# Altium PCB PCB1.PcbDoc (part 2 of 3)
Units mm, origin at the board's own origin, x right, y up, seen from the top; angles counter-clockwise.
Board outline 68.5 x 51.7 mm, 2 copper layers (Top Layer, Bottom Layer); 40 components, 24 nets, 162 pads, 41 vias.
Unrouted connection lines stored in the file: 2.
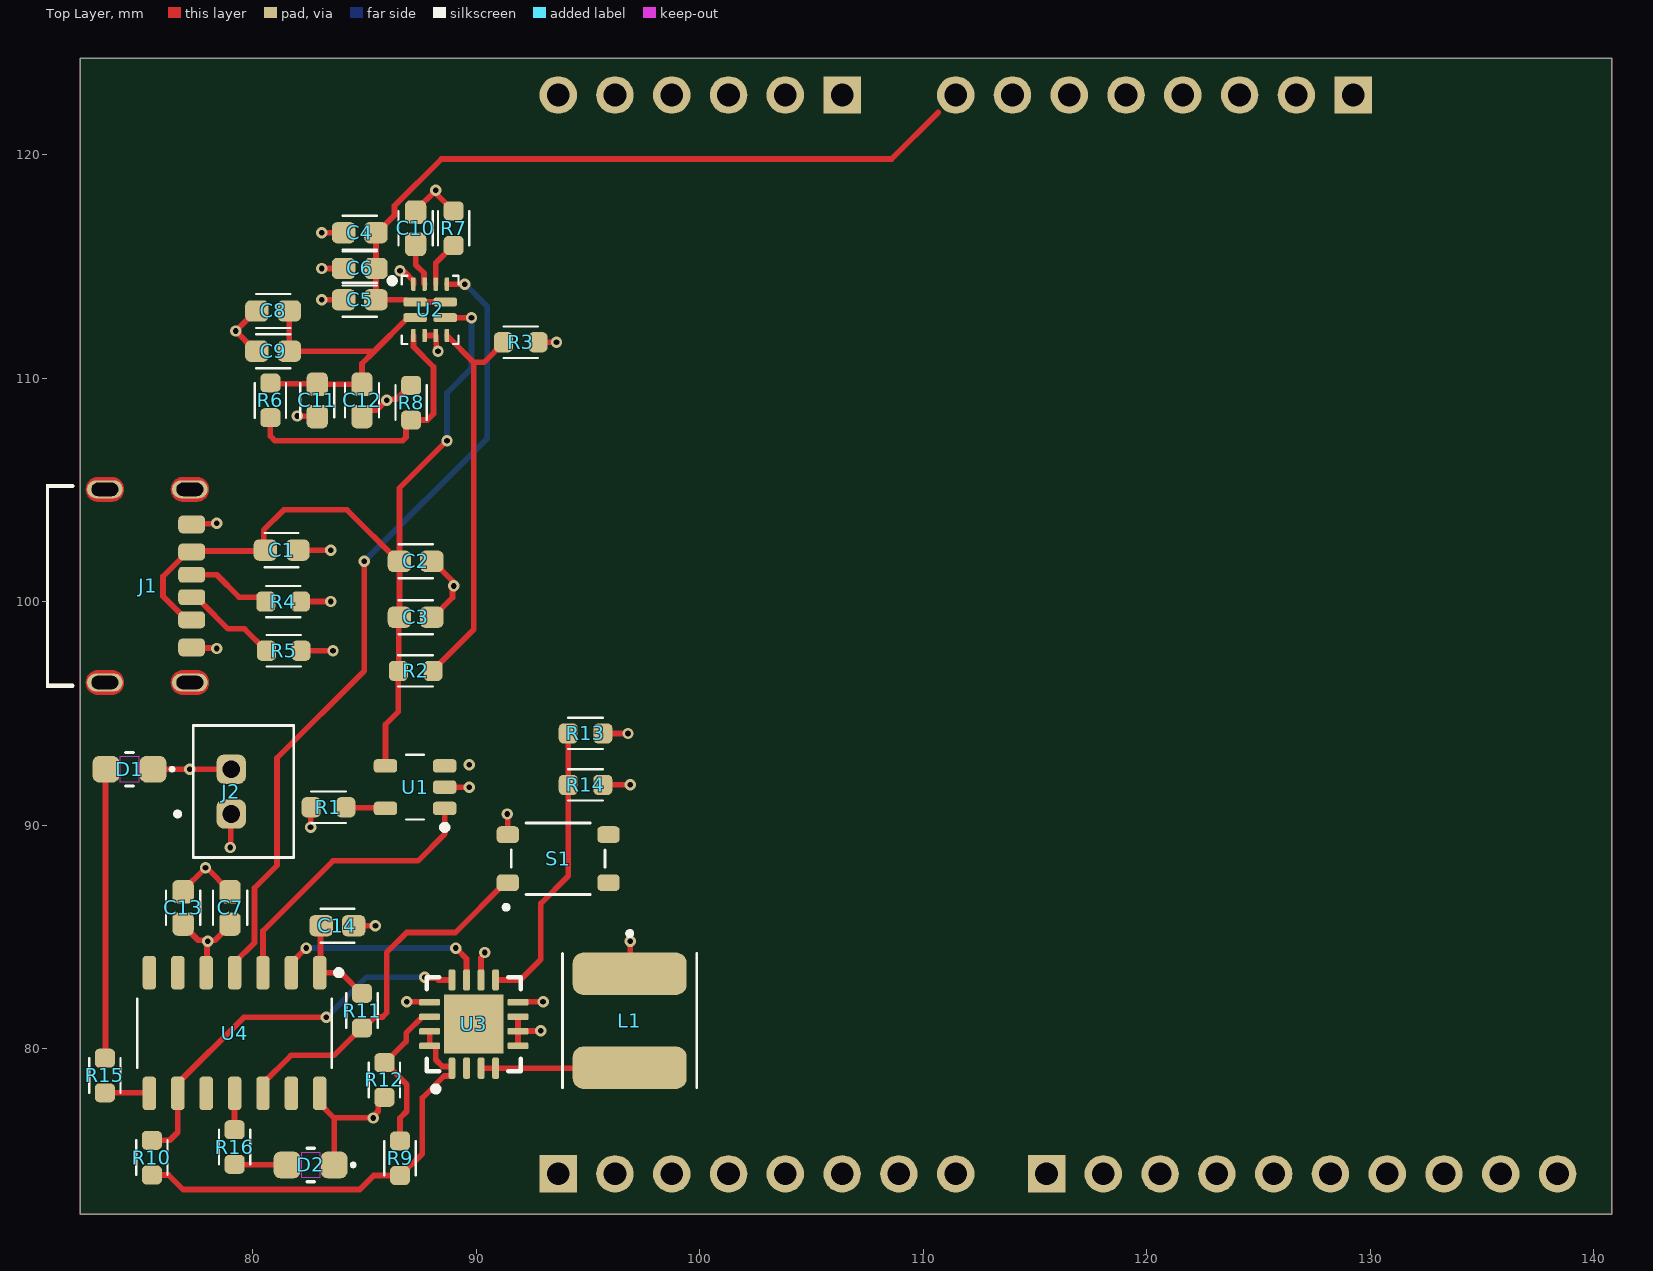
[diagram p0: Top Layer view]

## Part data (continued)
J1: "USB Connector, 6 Contact(s), Male, Right Angle, Surface Mount Terminal, Locking, Receptacle", Contact Resistance=50mΩ, Current Rating=4.25A, Dielectric Material="Liquid Crystal Polymer", Insulation Resistance=100MΩ, Manufacturer="Global Connector Technology", Max Operating Temperature=85°C, Min Operating Temperature=-30°C, Package=None, Supplier Part Number=2073-USB4125-GF-ACT-ND, Availability=Unavailable, Category="USB Connectors", China RoHS=Compliant, ComponentLink1Description=https://datasheet.octopart.com:443/USB4125-GF-A-Global-Connector-Technology-datasheet-166929326.pdf?src-supplier=SOS+electronic, ComponentLink1URL=https://datasheet.octopart.com:443/USB4125-GF-A-Global-Connector-Technology-datasheet-166929326.pdf?src-supplier=SOS+electronic, ComponentLink2Description=https://datasheet.octopart.com:443/USB4125-GF-A-GCT-datasheet-188869080.pdf?src-supplier=TME, ComponentLink2URL=https://datasheet.octopart.com:443/USB4125-GF-A-GCT-datasheet-188869080.pdf?src-supplier=TME, ComponentLink3Description=https://datasheet.octopart.com:443/USB4125-GF-A-GCT-datasheet-188869081.pdf?src-supplier=TME, ComponentLink3URL=https://datasheet.octopart.com:443/USB4125-GF-A-GCT-datasheet-188869081.pdf?src-supplier=TME, ComponentLink4Description=https://datasheet.octopart.com:443/USB4125-GF-A-GCT-datasheet-166929327.pdf?src-supplier=TME, ComponentLink4URL=https://datasheet.octopart.com:443/USB4125-GF-A-GCT-datasheet-166929327.pdf?src-supplier=TME, ComponentLink5Description=https://datasheet.octopart.com:443/USB4125-GF-A-Global-Connector-Technology-datasheet-148864632.pdf?src-supplier=Future+Electronics, ComponentLink5URL=https://datasheet.octopart.com:443/USB4125-GF-A-Global-Connector-Technology-datasheet-148864632.pdf?src-supplier=Future+Electronics, Contact Gender=Male, Gender=Receptacle, Lifecycle Status=Production, Manufacturer Part Number=USB4125-GF-A, MP=USB4125-GF-A_REVA2, Number of Ports=1, Number of Rows=1, Orientation=Horizontal, Pins=6, Price=None, Pricing="1=0,59, 10=0,505, 25=0,4736, 50=0,451, 100=0,4293, 250=0,4024, 500=0,38318 (USD)", REACH SVHC=Yes, RoHS=Compliant, Shell Finish=Nickel, Shell Material="Stainless Steel", Stock=22186, Supplier=DigiKey, Supplier 1=DigiKey, Supplier Part Number 1=2073-USB4125-GF-ACT-ND, Terminal Pitch=1mm
J2: "Connector Header, PH Series, 2 Position, 2.00mm, Through Hole, Press-Fit, Solder, Natural", Contact Resistance=20mΩ, Current Rating=2A, Housing Color=Natural, Insulation Resistance=1GΩ, Manufacturer=JST, Manufacturer Part Number=B2B-PH-K-S(LF)(SN), Max Operating Temperature=85°C, Max Voltage Rating (AC)=100V, Min Operating Temperature=-25°C, Package=None, Supplier Part Number=306-B2BPHKSLFSNPP, Category="Headers and Wire Housings", Check_prices=https://www.snapeda.com/parts/B2B-PH-K-S/JST/view-part/?ref=eda, China RoHS=Compliant, ComponentLink1Description=https://datasheet.octopart.com:443/B2B-PH-K-S%28LF%29%28SN%29-JST-datasheet-180491669.pdf?src-supplier=IHS, ComponentLink1URL=https://datasheet.octopart.com:443/B2B-PH-K-S%28LF%29%28SN%29-JST-datasheet-180491669.pdf?src-supplier=IHS, ComponentLink2Description=https://datasheet.octopart.com:443/B2B-PH-K-S%28LF%29%28SN%29-JST-datasheet-10411123.pdf?src-supplier=Upverter, ComponentLink2URL=https://datasheet.octopart.com:443/B2B-PH-K-S%28LF%29%28SN%29-JST-datasheet-10411123.pdf?src-supplier=Upverter, ComponentLink3Description=https://datasheet.octopart.com:443/B2B-PH-K-S%28LF%29%28SN%29-JST-datasheet-8324864.pdf?src-supplier=Upverter, ComponentLink3URL=https://datasheet.octopart.com:443/B2B-PH-K-S%28LF%29%28SN%29-JST-datasheet-8324864.pdf?src-supplier=Upverter, ComponentLink4Description=https://datasheet.octopart.com:443/B2B-PH-K-S%28LF%29%28SN%29-JST-datasheet-62336358.pdf?src-supplier=element14+APAC, ComponentLink4URL=https://datasheet.octopart.com:443/B2B-PH-K-S%28LF%29%28SN%29-JST-datasheet-62336358.pdf?src-supplier=element14+APAC, ComponentLink5Description=https://datasheet.octopart.com:443/B2B-PH-K-S%28LF%29%28SN%29-JST-datasheet-520811.pdf?src-supplier=element14+APAC, ComponentLink5URL=https://datasheet.octopart.com:443/B2B-PH-K-S%28LF%29%28SN%29-JST-datasheet-520811.pdf?src-supplier=element14+APAC, ComponentLink6Description=https://datasheet.octopart.com:443/B2B-PH-K-S%28LF%29%28SN%29-JST-datasheet-15068535.pdf?src-supplier=SOS+electronic, ComponentLink6URL=https://datasheet.octopart.com:443/B2B-PH-K-S%28LF%29%28SN%29-JST-datasheet-15068535.pdf?src-supplier=SOS+electronic, ComponentLink7Description=https://datasheet.octopart.com:443/B2B-PH-K-S%28LF%29%28SN%29-JST-datasheet-147762421.pdf?src-supplier=LKR, ComponentLink7URL=https://datasheet.octopart.com:443/B2B-PH-K-S%28LF%29%28SN%29-JST-datasheet-147762421.pdf?src-supplier=LKR, ComponentLink8Description=https://datasheet.octopart.com:443/B2B-PH-K-S%28LF%29%28SN%29-JST-datasheet-12510261.pdf?src-supplier=Future+Electronics, ComponentLink8URL=https://datasheet.octopart.com:443/B2B-PH-K-S%28LF%29%28SN%29-JST-datasheet-12510261.pdf?src-supplier=Future+Electronics, ComponentLink9Description=https://datasheet.octopart.com:443/B2B-PH-K-S%28LF%29%28SN%29-JST-datasheet-56537.pdf?src-supplier=Future+Electronics, ComponentLink9URL=https://datasheet.octopart.com:443/B2B-PH-K-S%28LF%29%28SN%29-JST-datasheet-56537.pdf?src-supplier=Future+Electronics, ComponentLink10Description=https://datasheet.octopart.com:443/B2B-PH-K-S%28LF%29%28SN%29-JST-datasheet-159515011.pdf?src-supplier=Amar+Radio+Corporation, ComponentLink10URL=https://datasheet.octopart.com:443/B2B-PH-K-S%28LF%29%28SN%29-JST-datasheet-159515011.pdf?src-supplier=Amar+Radio+Corporation, Connector Type="Male Pin", Contact Gender=Male, Contact Material=Brass, Contact Mating Length=3.302mm, Contact Plating=Tin, Depth=4.5mm, Fastening Type=Detent, Gender=Female, Height=6mm, Housing Material=Nylon, Lead Free="Lead Free", Lead Pitch=2mm, Length=5.9mm, Lifecycle Status=Production, Max Current Rating=2A, Max Voltage Rating (DC)=100V, MF="JST Sales America Inc.", Mounting Technology="Through Hole", MP=B2B-PH-K-S, Number of Contacts=2, Number of Poles=2, Number of Positions=2, Number of Rows=1, Orientation=Straight, Packaging=Bulk, Pins=2, Pitch=2mm, Pricing="1=0,1, 10=0,083, 50=0,083, 100=0,071, 1000=0,059, 10000=0,05 (USD)", REACH SVHC=Yes, RoHS=Compliant, Schedule B=8536694040, SnapEDA_Link=https://www.snapeda.com/parts/B2B-PH-K-S/JST/view-part/?ref=snap, Stock=3729, Supplier=Mouser, Supplier 1=Mouser, Supplier Part Number 1=306-B2BPHKSLFSNPP, Terminal Pitch=2mm, Termination=Solder, Voltage Rating=100V, Voltage Rating (AC)=100V, Voltage Rating (DC)=100V, Weight=28.349523g, Width=4.5mm, Working Voltage=100V
L1: library part "INDUCTOR - GENERIC", "Inductor Power Shielded Wirewound 6.8uH 20% 100KHz Ferrite 3.6A 0.0468Ohm DCR 2424 T/R", .Max DC Current='', .RMS Current (Irms)=3.6A, .Value=6.8µH, Case/Package=2424, Current Rating=4.7A, DC Resistance (DCR)=47mΩ, Inductance Tolerance=20%, Manufacturer=TDK, Manufacturer Lifecycle Status=PRODUCTION, Max Operating Temperature=105°C, Min Operating Temperature=-40°C, Supplier Part Number=445-173057-1-ND, Test Frequency=100kHz, Category="Fixed Inductors", ComponentLink1Description=https://datasheet.octopart.com:443/VLS6045EX-6R8M-TDK-datasheet-181269184.pdf?src-supplier=IHS, ComponentLink1URL=https://datasheet.octopart.com:443/VLS6045EX-6R8M-TDK-datasheet-181269184.pdf?src-supplier=IHS, ComponentLink2Description=https://datasheet.octopart.com:443/VLS6045EX-6R8M-TDK-datasheet-153842173.pdf?src-supplier=ODG+(Origin+Data+Global), ComponentLink2URL=https://datasheet.octopart.com:443/VLS6045EX-6R8M-TDK-datasheet-153842173.pdf?src-supplier=ODG+(Origin+Data+Global), ComponentLink3Description=https://datasheet.octopart.com:443/VLS6045EX-6R8M-TDK-datasheet-82987839.pdf?src-supplier=Newark, ComponentLink3URL=https://datasheet.octopart.com:443/VLS6045EX-6R8M-TDK-datasheet-82987839.pdf?src-supplier=Newark, ComponentLink4Description=https://datasheet.octopart.com:443/VLS6045EX-6R8M-TDK-datasheet-41475571.pdf?src-supplier=Newark, ComponentLink4URL=https://datasheet.octopart.com:443/VLS6045EX-6R8M-TDK-datasheet-41475571.pdf?src-supplier=Newark, ComponentLink5Description=https://datasheet.octopart.com:443/VLS6045EX-6R8M-TDK-datasheet-60278255.pdf?src-supplier=Future+Electronics, ComponentLink5URL=https://datasheet.octopart.com:443/VLS6045EX-6R8M-TDK-datasheet-60278255.pdf?src-supplier=Future+Electronics, Composition=Wirewound, Core Material=Ferrite, Height=4.5mm, Height - Seated (Max)=4.4958mm, Length=6mm, Lifecycle Status=Production, Manufacturer Part Number=VLS6045EX-6R8M, Max Current Rating=3.6A, Max Length=6.3mm, Max Width=6.3mm, Min Length=5.7mm, Min Width=5.7mm, Mounting Technology="Surface Mount", Number of Circuits=1, Number of Terminals=2, Pricing="1=0,34, 10=0,284, 100=0,2333 (USD)", REACH SVHC=Yes, RMS Current (Irms)=3.6A, RoHS=Compliant, Saturation Current=4.7A, Schedule B="8504500000, 8504500000|8504500000, 8504500000|8504500000|8504500000, 8504500000|8504500000|8504500000|8504500000", Shielding=Yes, Stock=199761, Supplier=DigiKey, Supplier 1=DigiKey, Supplier Part Number 1=445-173057-1-ND, Tolerance=20%, Width=6mm
R1: library part "RESISTOR - GENERIC", "Res Thick Film 0603 2K Ohm 1% 0.1W(1/10W) ±100ppm/C Epoxy Pad SMD Automotive T/R", .Case/Package=0603, .Tolerance=1%, Manufacturer="Yageo Group", Manufacturer Part Number=AC0603FR-102KL, Max Operating Temperature=155°C, Min Operating Temperature=-55°C, Power Dissipation=100mW, Supplier Part Number=13-AC0603FR-102KLCT-ND, Temperature Coefficient=100ppm/°C, Voltage Rating=75V, Case/Package=0603, Category="Chip SMD Resistors", China RoHS=Non-Compliant, ComponentLink1Description=https://datasheet.octopart.com:443/AC0603FR-102KL-Yageo-datasheet-182189377.pdf?src-supplier=IHS, ComponentLink1URL=https://datasheet.octopart.com:443/AC0603FR-102KL-Yageo-datasheet-182189377.pdf?src-supplier=IHS, ComponentLink2Description=https://datasheet.octopart.com:443/AC0603FR-102KL-Yageo-datasheet-151884373.pdf?src-supplier=Upverter, ComponentLink2URL=https://datasheet.octopart.com:443/AC0603FR-102KL-Yageo-datasheet-151884373.pdf?src-supplier=Upverter, ComponentLink3Description=https://sigma.octopart.com:443/138820526/technical_drawing/Yageo-AC0603FR-102KL.pdf?src-supplier=Upverter, ComponentLink3URL=https://sigma.octopart.com:443/138820526/technical_drawing/Yageo-AC0603FR-102KL.pdf?src-supplier=Upverter, ComponentLink4Description=https://datasheet.octopart.com:443/AC0603FR-102KL-Yageo-datasheet-86786639.pdf?src-supplier=Upverter, ComponentLink4URL=https://datasheet.octopart.com:443/AC0603FR-102KL-Yageo-datasheet-86786639.pdf?src-supplier=Upverter, ComponentLink5Description=https://datasheet.octopart.com:443/AC0603FR-102KL-Yageo-datasheet-178509465.pdf?src-supplier=Farnell, ComponentLink5URL=https://datasheet.octopart.com:443/AC0603FR-102KL-Yageo-datasheet-178509465.pdf?src-supplier=Farnell, ComponentLink6Description=https://datasheet.octopart.com:443/AC0603FR-102KL-Yageo-datasheet-166720450.pdf?src-supplier=JRH+Electronics, ComponentLink6URL=https://datasheet.octopart.com:443/AC0603FR-102KL-Yageo-datasheet-166720450.pdf?src-supplier=JRH+Electronics, ComponentLink7Description=https://datasheet.octopart.com:443/AC0603FR-102KL-Yageo-datasheet-137699919.pdf?src-supplier=Future+Electronics, ComponentLink7URL=https://datasheet.octopart.com:443/AC0603FR-102KL-Yageo-datasheet-137699919.pdf?src-supplier=Future+Electronics, ComponentLink8Description=https://datasheet.octopart.com/AC0603FR-102KL-Yageo-datasheet-12512238.pdf, ComponentLink8URL=https://datasheet.octopart.com/AC0603FR-102KL-Yageo-datasheet-12512238.pdf, ComponentLink9Description=http://sigma.octopart.com:80/rohs_statement/Yageo-company-2.pdf?src-supplier=Compliance+Statements, ComponentLink9URL=http://sigma.octopart.com:80/rohs_statement/Yageo-company-2.pdf?src-supplier=Compliance+Statements, ComponentLink10Description=http://sigma.octopart.com:80/conflict_mineral_statement/Yageo-company-3.pdf?src-supplier=Compliance+Statements, ComponentLink10URL=http://sigma.octopart.com:80/conflict_mineral_statement/Yageo-company-3.pdf?src-supplier=Compliance+Statements, Composition="Thick Film", Height=450µm, Lifecycle Status=Production, Mounting Technology="Surface Mount", Number of Terminals=2, Packaging="Tape & Reel", Power Rating=100mW, Pricing="1=0,1, 10=0,007, 25=0,006, 50=0,0052, 100=0,005 (USD)", REACH SVHC=Yes, RoHS=Compliant, Stock=20182, Supplier=DigiKey, Supplier 1=DigiKey, Supplier Part Number 1=13-AC0603FR-102KLCT-ND, Tolerance=1%, Width=800µm, Working Voltage=75V
R2: library part "RESISTOR - GENERIC", "Res Thick Film 0603 8.2K Ohm 1% 0.1W(1/10W) ±100ppm/C Pad SMD T/R", .Case/Package=0603, .Tolerance=1%, Case Code (Metric)=1608, Manufacturer="Yageo Group", Manufacturer Part Number=RC0603FR-138K2L, Max Operating Temperature=155°C, Min Operating Temperature=-55°C, Power Dissipation=100mW, Supplier Part Number=13-RC0603FR-138K2LCT-ND, Temperature Coefficient=100ppm/°C, Voltage Rating=50V, Working Voltage=75V, Case Code (Imperial)=0603, Case/Package=0603, Category="Chip SMD Resistors", China RoHS=Non-Compliant, ComponentLink1Description=https://datasheet.octopart.com:443/RC0603FR-138K2L-Yageo-datasheet-175887523.pdf?src-supplier=Newark, ComponentLink1URL=https://datasheet.octopart.com:443/RC0603FR-138K2L-Yageo-datasheet-175887523.pdf?src-supplier=Newark, ComponentLink2Description=https://datasheet.octopart.com:443/RC0603FR-138K2L-Yageo-datasheet-164759695.pdf?src-supplier=Future+Electronics, ComponentLink2URL=https://datasheet.octopart.com:443/RC0603FR-138K2L-Yageo-datasheet-164759695.pdf?src-supplier=Future+Electronics, ComponentLink3Description=https://datasheet.octopart.com/RC0603FR-138K2L-Yageo-datasheet-73766026.pdf, ComponentLink3URL=https://datasheet.octopart.com/RC0603FR-138K2L-Yageo-datasheet-73766026.pdf, ComponentLink4Description=http://sigma.octopart.com:80/rohs_statement/Yageo-company-2.pdf?src-supplier=Compliance+Statements, ComponentLink4URL=http://sigma.octopart.com:80/rohs_statement/Yageo-company-2.pdf?src-supplier=Compliance+Statements, ComponentLink5Description=http://sigma.octopart.com:80/conflict_mineral_statement/Yageo-company-3.pdf?src-supplier=Compliance+Statements, ComponentLink5URL=http://sigma.octopart.com:80/conflict_mineral_statement/Yageo-company-3.pdf?src-supplier=Compliance+Statements, Composition="Thick Film", Depth=800µm, Height=450µm, Length=1.6mm, Lifecycle Status=Production, Military Standard=Not, Mounting Technology="Surface Mount", Number of Terminals=2, Power Rating=100mW, Pricing="1=0,1, 10=0,008, 25=0,0072, 50=0,0062, 100=0,0051, 250=0,004 (USD)", REACH SVHC=Yes, RoHS=Compliant, Schedule B="8533210045, 8533210045|8533210045, 8533210045|8533210045|8533210045, 8533210045|8533210045|8533210045|8533210045", Stock=30843, Supplier=DigiKey, Supplier 1=DigiKey, Supplier Part Number 1=13-RC0603FR-138K2LCT-ND, Termination=SMD/SMT, Tolerance=1%, Width=800µm
R3 R4 R5 R8: library part "RESISTOR - GENERIC", "Res Thick Film 0603 5.1K Ohm 1% 0.1W(1/10W) ±100ppm/C Pad SMD T/R", .Case/Package=0603, .Tolerance=1%, Manufacturer="Yageo Group", Manufacturer Part Number=RC0603FR-075K1L, Max Operating Temperature=155°C, Max Power Dissipation=100mW, Min Operating Temperature=-55°C, Supplier Part Number=311-5.10KHRCT-ND, Temperature Coefficient=100ppm/°C, Voltage Rating=75V, Voltage Rating (DC)=50V, Case Code (Imperial)=0603, Case/Package=0603, Category="Chip SMD Resistors", China RoHS=Non-Compliant, ComponentLink1Description=https://datasheet.octopart.com:443/RC0603FR-075K1L-Yageo-datasheet-175887523.pdf?src-supplier=IHS, ComponentLink1URL=https://datasheet.octopart.com:443/RC0603FR-075K1L-Yageo-datasheet-175887523.pdf?src-supplier=IHS, ComponentLink2Description=https://datasheet.octopart.com:443/RC0603FR-075K1L-Yageo-datasheet-103092701.pdf?src-supplier=Upverter, ComponentLink2URL=https://datasheet.octopart.com:443/RC0603FR-075K1L-Yageo-datasheet-103092701.pdf?src-supplier=Upverter, ComponentLink3Description=https://datasheet.octopart.com:443/RC0603FR-075K1L-Yageo-datasheet-8328172.pdf?src-supplier=Farnell, ComponentLink3URL=https://datasheet.octopart.com:443/RC0603FR-075K1L-Yageo-datasheet-8328172.pdf?src-supplier=Farnell, ComponentLink4Description=https://datasheet.octopart.com:443/RC0603FR-075K1L-Yageo-datasheet-62067350.pdf?src-supplier=Farnell, ComponentLink4URL=https://datasheet.octopart.com:443/RC0603FR-075K1L-Yageo-datasheet-62067350.pdf?src-supplier=Farnell, ComponentLink5Description=https://datasheet.octopart.com:443/RC0603FR-075K1L-Yageo-datasheet-34211833.pdf?src-supplier=element14+APAC, ComponentLink5URL=https://datasheet.octopart.com:443/RC0603FR-075K1L-Yageo-datasheet-34211833.pdf?src-supplier=element14+APAC, ComponentLink6Description=https://datasheet.octopart.com:443/RC0603FR-075K1L-Yageo-datasheet-164759695.pdf?src-supplier=Future+Electronics, ComponentLink6URL=https://datasheet.octopart.com:443/RC0603FR-075K1L-Yageo-datasheet-164759695.pdf?src-supplier=Future+Electronics, ComponentLink7Description=https://datasheet.octopart.com:443/RC0603FR-075K1L-Yageo-datasheet-137700087.pdf?src-supplier=Future+Electronics, ComponentLink7URL=https://datasheet.octopart.com:443/RC0603FR-075K1L-Yageo-datasheet-137700087.pdf?src-supplier=Future+Electronics, ComponentLink8Description=https://datasheet.octopart.com:443/RC0603FR-075K1L-Yageo-datasheet-15599030.pdf?src-supplier=Future+Electronics, ComponentLink8URL=https://datasheet.octopart.com:443/RC0603FR-075K1L-Yageo-datasheet-15599030.pdf?src-supplier=Future+Electronics, ComponentLink9Description=https://datasheet.octopart.com:443/RC0603FR-075K1L-Yageo-datasheet-12596169.pdf?src-supplier=Future+Electronics, ComponentLink9URL=https://datasheet.octopart.com:443/RC0603FR-075K1L-Yageo-datasheet-12596169.pdf?src-supplier=Future+Electronics, ComponentLink10Description=https://datasheet.octopart.com:443/RC0603FR-075K1L-Yageo-datasheet-503470.pdf?src-supplier=Future+Electronics, ComponentLink10URL=https://datasheet.octopart.com:443/RC0603FR-075K1L-Yageo-datasheet-503470.pdf?src-supplier=Future+Electronics, ComponentLink11Description=https://datasheet.octopart.com:443/RC0603FR-075K1L-Yageo-datasheet-148775077.pdf?src-supplier=TME, ComponentLink11URL=https://datasheet.octopart.com:443/RC0603FR-075K1L-Yageo-datasheet-148775077.pdf?src-supplier=TME, ComponentLink12Description=https://datasheet.octopart.com:443/RC0603FR-075K1L-Yageo-datasheet-79472498.pdf?src-supplier=Megastar, ComponentLink12URL=https://datasheet.octopart.com:443/RC0603FR-075K1L-Yageo-datasheet-79472498.pdf?src-supplier=Megastar, ComponentLink13Description=https://datasheet.octopart.com/RC0603FR-075K1L-Yageo-datasheet-73766026.pdf, ComponentLink13URL=https://datasheet.octopart.com/RC0603FR-075K1L-Yageo-datasheet-73766026.pdf, ComponentLink14Description=https://datasheet.octopart.com:443/RC0603FR-075K1L-Yageo-datasheet-118562.pdf?src-supplier=DigiKey, ComponentLink14URL=https://datasheet.octopart.com:443/RC0603FR-075K1L-Yageo-datasheet-118562.pdf?src-supplier=DigiKey, ComponentLink15Description=http://sigma.octopart.com:80/conflict_mineral_statement/Yageo-company-3.pdf?src-supplier=Compliance+Statements, ComponentLink15URL=http://sigma.octopart.com:80/conflict_mineral_statement/Yageo-company-3.pdf?src-supplier=Compliance+Statements, ComponentLink16Description=http://sigma.octopart.com:80/rohs_statement/Yageo-company-2.pdf?src-supplier=Compliance+Statements, ComponentLink16URL=http://sigma.octopart.com:80/rohs_statement/Yageo-company-2.pdf?src-supplier=Compliance+Statements, Composition="Thick Film", Depth=800µm, Features="Moisture Resistant", Height=450µm, Lead Free="Lead Free", Lifecycle Status=Production, Military Standard=Not, Mounting Technology="Surface Mount", Number of Terminals=2, Number of Terminations=2, Packaging="Tape & Reel", Pins=2, Power Dissipation=100mW, Power Rating=100mW, Pricing="1=0,1, 10=0,007, 25=0,0068, 50=0,0062, 100=0,0056 (USD)", REACH SVHC=Yes, RoHS=Compliant, Schedule B="8533210045, 8533210045|8533210045, 8533210045|8533210045|8533210045, 8533210045|8533210045|8533210045|8533210045", Stock=734211, Supplier=DigiKey, Supplier 1=DigiKey, Supplier Part Number 1=311-5.10KHRCT-ND, Termination=SMD/SMT, Tolerance=1%, Width=800µm, Working Voltage=75V
R6 R11: library part "RESISTOR - GENERIC", "100mW Thick Film Resistors ±100ppm/℃ ±1% 10kΩ 0603 Chip Resistor - Surface Mount ROHS", .Case/Package=0603, .Tolerance=1%, Manufacturer="Yageo Group", Manufacturer Part Number=RC0603FR-0710KL, Max Operating Temperature=155°C, Min Operating Temperature=-55°C, Power Dissipation=100mW, Supplier Part Number=311-10.0KHRCT-ND, Temperature Coefficient=100ppm/°C, Voltage Rating=75V, Voltage Rating (DC)=50V, Case Code (Imperial)=0603, Case Code (Metric)=0603, Case/Package=0603, Category="Chip SMD Resistors", China RoHS=Non-Compliant, ComponentLink1Description=https://datasheet.octopart.com:443/RC0603FR-0710KL-Yageo-datasheet-175887523.pdf?src-supplier=IHS, ComponentLink1URL=https://datasheet.octopart.com:443/RC0603FR-0710KL-Yageo-datasheet-175887523.pdf?src-supplier=IHS, ComponentLink2Description=https://datasheet.octopart.com:443/RC0603FR-0710KL-Yageo-datasheet-103092701.pdf?src-supplier=Upverter, ComponentLink2URL=https://datasheet.octopart.com:443/RC0603FR-0710KL-Yageo-datasheet-103092701.pdf?src-supplier=Upverter, ComponentLink3Description=https://datasheet.octopart.com:443/RC0603FR-0710KL-Yageo-datasheet-98239111.pdf?src-supplier=Upverter, ComponentLink3URL=https://datasheet.octopart.com:443/RC0603FR-0710KL-Yageo-datasheet-98239111.pdf?src-supplier=Upverter, ComponentLink4Description=https://datasheet.octopart.com:443/RC0603FR-0710KL-Yageo-datasheet-141265859.pdf?src-supplier=Upverter, ComponentLink4URL=https://datasheet.octopart.com:443/RC0603FR-0710KL-Yageo-datasheet-141265859.pdf?src-supplier=Upverter, ComponentLink5Description=https://sigma.octopart.com:443/138820526/technical_drawing/Yageo-RC0603FR-0710KL.pdf?src-supplier=Upverter, ComponentLink5URL=https://sigma.octopart.com:443/138820526/technical_drawing/Yageo-RC0603FR-0710KL.pdf?src-supplier=Upverter, ComponentLink6Description=https://datasheet.octopart.com:443/RC0603FR-0710KL-Yageo-datasheet-8328172.pdf?src-supplier=Farnell, ComponentLink6URL=https://datasheet.octopart.com:443/RC0603FR-0710KL-Yageo-datasheet-8328172.pdf?src-supplier=Farnell, ComponentLink7Description=https://datasheet.octopart.com:443/RC0603FR-0710KL-Yageo-datasheet-13691069.pdf?src-supplier=Farnell, ComponentLink7URL=https://datasheet.octopart.com:443/RC0603FR-0710KL-Yageo-datasheet-13691069.pdf?src-supplier=Farnell, ComponentLink8Description=https://datasheet.octopart.com:443/RC0603FR-0710KL-Yageo-datasheet-62067350.pdf?src-supplier=element14+APAC, ComponentLink8URL=https://datasheet.octopart.com:443/RC0603FR-0710KL-Yageo-datasheet-62067350.pdf?src-supplier=element14+APAC, ComponentLink9Description=https://datasheet.octopart.com:443/RC0603FR-0710KL-Yageo-datasheet-17842380.pdf?src-supplier=element14+APAC, ComponentLink9URL=https://datasheet.octopart.com:443/RC0603FR-0710KL-Yageo-datasheet-17842380.pdf?src-supplier=element14+APAC, ComponentLink10Description=https://datasheet.octopart.com:443/RC0603FR-0710KL-Yageo-datasheet-15599030.pdf?src-supplier=Future+Electronics, ComponentLink10URL=https://datasheet.octopart.com:443/RC0603FR-0710KL-Yageo-datasheet-15599030.pdf?src-supplier=Future+Electronics, ComponentLink11Description=https://datasheet.octopart.com:443/RC0603FR-0710KL-Yageo-datasheet-164759695.pdf?src-supplier=Future+Electronics, ComponentLink11URL=https://datasheet.octopart.com:443/RC0603FR-0710KL-Yageo-datasheet-164759695.pdf?src-supplier=Future+Electronics, ComponentLink12Description=https://datasheet.octopart.com:443/RC0603FR-0710KL-Yageo-datasheet-127823281.pdf?src-supplier=Future+Electronics, ComponentLink12URL=https://datasheet.octopart.com:443/RC0603FR-0710KL-Yageo-datasheet-127823281.pdf?src-supplier=Future+Electronics, ComponentLink13Description=https://datasheet.octopart.com:443/RC0603FR-0710KL-Yageo-datasheet-137700087.pdf?src-supplier=Future+Electronics, ComponentLink13URL=https://datasheet.octopart.com:443/RC0603FR-0710KL-Yageo-datasheet-137700087.pdf?src-supplier=Future+Electronics, ComponentLink14Description=https://datasheet.octopart.com:443/RC0603FR-0710KL-Yageo-datasheet-27584510.pdf?src-supplier=Future+Electronics, ComponentLink14URL=https://datasheet.octopart.com:443/RC0603FR-0710KL-Yageo-datasheet-27584510.pdf?src-supplier=Future+Electronics, ComponentLink15Description=https://datasheet.octopart.com:443/RC0603FR-0710KL-Yageo-datasheet-8324193.pdf?src-supplier=Future+Electronics, ComponentLink15URL=https://datasheet.octopart.com:443/RC0603FR-0710KL-Yageo-datasheet-8324193.pdf?src-supplier=Future+Electronics, ComponentLink16Description=https://datasheet.octopart.com:443/RC0603FR-0710KL-Yageo-datasheet-12596169.pdf?src-supplier=Newark, ComponentLink16URL=https://datasheet.octopart.com:443/RC0603FR-0710KL-Yageo-datasheet-12596169.pdf?src-supplier=Newark, ComponentLink17Description=https://datasheet.octopart.com:443/RC0603FR-0710KL-Yageo-datasheet-503470.pdf?src-supplier=Newark, ComponentLink17URL=https://datasheet.octopart.com:443/RC0603FR-0710KL-Yageo-datasheet-503470.pdf?src-supplier=Newark, ComponentLink18Description=https://datasheet.octopart.com:443/RC0603FR-0710KL-Yageo-datasheet-34211833.pdf?src-supplier=Newark, ComponentLink18URL=https://datasheet.octopart.com:443/RC0603FR-0710KL-Yageo-datasheet-34211833.pdf?src-supplier=Newark, ComponentLink19Description=https://datasheet.octopart.com:443/RC0603FR-0710KL-Yageo-datasheet-79472498.pdf?src-supplier=Megastar, ComponentLink19URL=https://datasheet.octopart.com:443/RC0603FR-0710KL-Yageo-datasheet-79472498.pdf?src-supplier=Megastar, ComponentLink20Description=https://datasheet.octopart.com/RC0603FR-0710KL-Yageo-datasheet-73766026.pdf, ComponentLink20URL=https://datasheet.octopart.com/RC0603FR-0710KL-Yageo-datasheet-73766026.pdf, ComponentLink21Description=https://datasheet.octopart.com:443/RC0603FR-0710KL-Yageo-datasheet-118562.pdf?src-supplier=DigiKey, ComponentLink21URL=https://datasheet.octopart.com:443/RC0603FR-0710KL-Yageo-datasheet-118562.pdf?src-supplier=DigiKey, ComponentLink22Description=http://sigma.octopart.com:80/conflict_mineral_statement/Yageo-company-3.pdf?src-supplier=Compliance+Statements, ComponentLink22URL=http://sigma.octopart.com:80/conflict_mineral_statement/Yageo-company-3.pdf?src-supplier=Compliance+Statements, ComponentLink23Description=http://sigma.octopart.com:80/rohs_statement/Yageo-company-2.pdf?src-supplier=Compliance+Statements, ComponentLink23URL=http://sigma.octopart.com:80/rohs_statement/Yageo-company-2.pdf?src-supplier=Compliance+Statements, Composition="Thick Film", Depth=800µm, Height=450µm, Lead Free="Lead Free", Lead Pitch=300µm, Length=1.6mm, Lifecycle Status=Production, Military Standard=Not, Mounting Technology="Surface Mount", Number of Terminals=2, Packaging="Tape & Reel", Pins=2, Power Rating=100mW, Pricing="1=0,1, 10=0,006, 25=0,0052 (USD)", REACH SVHC=Yes, RoHS=Compliant, Schedule B="8533210045, 8533210045|8533210045|8533210045|8533210045|8533210045|8533210045|8533210045|8533210045|8533210045|8533210045|8533210045|8533210045|8533210045|8533210045|8533210045|8533210045|8533210045|8533210045|8533210045|8533210045|8533210045|8533210045|8533210045|85", Stock=13219476, Supplier=DigiKey, Supplier 1=DigiKey, Supplier Part Number 1=311-10.0KHRCT-ND, Termination=SMD/SMT, Tolerance=1%, Weight=2.012816mg, Width=800µm, Working Voltage=75V
R7: library part "RESISTOR - GENERIC", "Res Thick Film 0603 21.5K Ohm 1% 0.1W(1/10W) ±100ppm/C Pad SMD T/R", .Case/Package=0603, .Tolerance=1%, Manufacturer="Yageo Group", Manufacturer Part Number=RC0603FR-0721K5L, Max Operating Temperature=155°C, Max Power Dissipation=100mW, Min Operating Temperature=-55°C, Supplier Part Number=603-RC0603FR-0721K5L, Temperature Coefficient=100ppm/°C, Voltage Rating=75V, Voltage Rating (DC)=50V, Case Code (Imperial)=0603, Case/Package=0603, Category="Chip SMD Resistors", China RoHS=Non-Compliant, ComponentLink1Description=https://datasheet.octopart.com:443/RC0603FR-0721K5L-Yageo-datasheet-175887523.pdf?src-supplier=Newark, ComponentLink1URL=https://datasheet.octopart.com:443/RC0603FR-0721K5L-Yageo-datasheet-175887523.pdf?src-supplier=Newark, ComponentLink2Description=https://datasheet.octopart.com:443/RC0603FR-0721K5L-Yageo-datasheet-103092701.pdf?src-supplier=Upverter, ComponentLink2URL=https://datasheet.octopart.com:443/RC0603FR-0721K5L-Yageo-datasheet-103092701.pdf?src-supplier=Upverter, ComponentLink3Description=https://datasheet.octopart.com:443/RC0603FR-0721K5L-Yageo-Group-datasheet-189192902.pdf?src-supplier=TME, ComponentLink3URL=https://datasheet.octopart.com:443/RC0603FR-0721K5L-Yageo-Group-datasheet-189192902.pdf?src-supplier=TME, ComponentLink4Description=https://datasheet.octopart.com:443/RC0603FR-0721K5L-Yageo-Group-datasheet-176638170.pdf?src-supplier=TME, ComponentLink4URL=https://datasheet.octopart.com:443/RC0603FR-0721K5L-Yageo-Group-datasheet-176638170.pdf?src-supplier=TME, ComponentLink5Description=https://datasheet.octopart.com:443/RC0603FR-0721K5L-Yageo-datasheet-164759695.pdf?src-supplier=Future+Electronics, ComponentLink5URL=https://datasheet.octopart.com:443/RC0603FR-0721K5L-Yageo-datasheet-164759695.pdf?src-supplier=Future+Electronics, ComponentLink6Description=https://datasheet.octopart.com:443/RC0603FR-0721K5L-Yageo-datasheet-137700087.pdf?src-supplier=Future+Electronics, ComponentLink6URL=https://datasheet.octopart.com:443/RC0603FR-0721K5L-Yageo-datasheet-137700087.pdf?src-supplier=Future+Electronics, ComponentLink7Description=https://datasheet.octopart.com:443/RC0603FR-0721K5L-Yageo-datasheet-15599030.pdf?src-supplier=Future+Electronics, ComponentLink7URL=https://datasheet.octopart.com:443/RC0603FR-0721K5L-Yageo-datasheet-15599030.pdf?src-supplier=Future+Electronics, ComponentLink8Description=https://datasheet.octopart.com:443/RC0603FR-0721K5L-Yageo-datasheet-12596169.pdf?src-supplier=Future+Electronics, ComponentLink8URL=https://datasheet.octopart.com:443/RC0603FR-0721K5L-Yageo-datasheet-12596169.pdf?src-supplier=Future+Electronics, ComponentLink9Description=https://datasheet.octopart.com:443/RC0603FR-0721K5L-Yageo-datasheet-8328172.pdf?src-supplier=Future+Electronics, ComponentLink9URL=https://datasheet.octopart.com:443/RC0603FR-0721K5L-Yageo-datasheet-8328172.pdf?src-supplier=Future+Electronics, ComponentLink10Description=https://datasheet.octopart.com/RC0603FR-0721K5L-Yageo-datasheet-73766026.pdf, ComponentLink10URL=https://datasheet.octopart.com/RC0603FR-0721K5L-Yageo-datasheet-73766026.pdf, ComponentLink11Description=https://datasheet.octopart.com:443/RC0603FR-0721K5L-Yageo-datasheet-118562.pdf?src-supplier=DigiKey, ComponentLink11URL=https://datasheet.octopart.com:443/RC0603FR-0721K5L-Yageo-datasheet-118562.pdf?src-supplier=DigiKey, ComponentLink12Description=http://sigma.octopart.com:80/conflict_mineral_statement/Yageo-company-3.pdf?src-supplier=Compliance+Statements, ComponentLink12URL=http://sigma.octopart.com:80/conflict_mineral_statement/Yageo-company-3.pdf?src-supplier=Compliance+Statements, ComponentLink13Description=http://sigma.octopart.com:80/rohs_statement/Yageo-company-2.pdf?src-supplier=Compliance+Statements, ComponentLink13URL=http://sigma.octopart.com:80/rohs_statement/Yageo-company-2.pdf?src-supplier=Compliance+Statements, Composition="Thick Film", Depth=800µm, Features="Moisture Resistant", Height=450µm, Lead Free="Lead Free", Length=1.6mm, Lifecycle Status=Production, Military Standard=Not, Mounting Technology="Surface Mount", Number of Terminals=2, Number of Terminations=2, Power Dissipation=100mW, Power Rating=100mW, Pricing="1=0,1, 10=0,006, 50=0,006, 100=0,006, 1000=0,006, 10000=0,002 (USD)", REACH SVHC=Yes, RoHS=Compliant, Schedule B="8533210045, 8533210045|8533210045, 8533210045|8533210045|8533210045, 8533210045|8533210045|8533210045|8533210045", Stock=1866808, Supplier=Mouser, Supplier 1=Mouser, Supplier Part Number 1=603-RC0603FR-0721K5L, Termination=SMD/SMT, Tolerance=1%, Width=800µm, Working Voltage=75V
R9: library part "RESISTOR - GENERIC", "Res Thick Film 0603 1.8M Ohm 1% 0.1W(1/10W) +/-100ppm/ﾟC Epoxy SMD T/R", .Case/Package=0603, .Tolerance=1%, Case Code (Metric)=1608, Manufacturer="Yageo Group", Manufacturer Part Number=RC0603FR-071M8L, Max Operating Temperature=155°C, Max Power Dissipation=100mW, Min Operating Temperature=-55°C, Supplier Part Number=YAG3328CT-ND, Temperature Coefficient=100ppm/°C, Voltage Rating=75V, Voltage Rating (AC)=50V, Case Code (Imperial)=0603, Case/Package=0603, Category="Chip SMD Resistors", China RoHS=Non-Compliant, ComponentLink1Description=https://datasheet.octopart.com:443/RC0603FR-071M8L-Yageo-datasheet-175887523.pdf?src-supplier=Newark, ComponentLink1URL=https://datasheet.octopart.com:443/RC0603FR-071M8L-Yageo-datasheet-175887523.pdf?src-supplier=Newark, ComponentLink2Description=https://datasheet.octopart.com:443/RC0603FR-071M8L-Yageo-datasheet-103092701.pdf?src-supplier=Upverter, ComponentLink2URL=https://datasheet.octopart.com:443/RC0603FR-071M8L-Yageo-datasheet-103092701.pdf?src-supplier=Upverter, ComponentLink3Description=https://datasheet.octopart.com:443/RC0603FR-071M8L-Yageo-datasheet-8328172.pdf?src-supplier=element14+APAC, ComponentLink3URL=https://datasheet.octopart.com:443/RC0603FR-071M8L-Yageo-datasheet-8328172.pdf?src-supplier=element14+APAC, ComponentLink4Description=https://datasheet.octopart.com:443/RC0603FR-071M8L-Yageo-datasheet-62067350.pdf?src-supplier=Farnell, ComponentLink4URL=https://datasheet.octopart.com:443/RC0603FR-071M8L-Yageo-datasheet-62067350.pdf?src-supplier=Farnell, ComponentLink5Description=https://datasheet.octopart.com:443/RC0603FR-071M8L-Yageo---Phycomp-datasheet-34211833.pdf?src-supplier=Farnell, ComponentLink5URL=https://datasheet.octopart.com:443/RC0603FR-071M8L-Yageo---Phycomp-datasheet-34211833.pdf?src-supplier=Farnell, ComponentLink6Description=https://datasheet.octopart.com:443/RC0603FR-071M8L-Yageo-datasheet-164759695.pdf?src-supplier=Future+Electronics, ComponentLink6URL=https://datasheet.octopart.com:443/RC0603FR-071M8L-Yageo-datasheet-164759695.pdf?src-supplier=Future+Electronics, ComponentLink7Description=https://datasheet.octopart.com:443/RC0603FR-071M8L-Yageo-datasheet-137700087.pdf?src-supplier=Future+Electronics, ComponentLink7URL=https://datasheet.octopart.com:443/RC0603FR-071M8L-Yageo-datasheet-137700087.pdf?src-supplier=Future+Electronics, ComponentLink8Description=https://datasheet.octopart.com:443/RC0603FR-071M8L-Yageo-datasheet-27584510.pdf?src-supplier=Future+Electronics, ComponentLink8URL=https://datasheet.octopart.com:443/RC0603FR-071M8L-Yageo-datasheet-27584510.pdf?src-supplier=Future+Electronics, ComponentLink9Description=https://datasheet.octopart.com:443/RC0603FR-071M8L-Yageo-datasheet-15599030.pdf?src-supplier=Future+Electronics, ComponentLink9URL=https://datasheet.octopart.com:443/RC0603FR-071M8L-Yageo-datasheet-15599030.pdf?src-supplier=Future+Electronics, ComponentLink10Description=https://datasheet.octopart.com:443/RC0603FR-071M8L-Yageo-datasheet-12596169.pdf?src-supplier=Future+Electronics, ComponentLink10URL=https://datasheet.octopart.com:443/RC0603FR-071M8L-Yageo-datasheet-12596169.pdf?src-supplier=Future+Electronics, ComponentLink11Description=https://datasheet.octopart.com:443/RC0603FR-071M8L-Yageo-datasheet-148775077.pdf?src-supplier=TME, ComponentLink11URL=https://datasheet.octopart.com:443/RC0603FR-071M8L-Yageo-datasheet-148775077.pdf?src-supplier=TME, ComponentLink12Description=https://datasheet.octopart.com/RC0603FR-071M8L-Yageo-datasheet-73766026.pdf, ComponentLink12URL=https://datasheet.octopart.com/RC0603FR-071M8L-Yageo-datasheet-73766026.pdf, ComponentLink13Description=http://sigma.octopart.com:80/rohs_statement/Yageo-company-2.pdf?src-supplier=Compliance+Statements, ComponentLink13URL=http://sigma.octopart.com:80/rohs_statement/Yageo-company-2.pdf?src-supplier=Compliance+Statements, ComponentLink14Description=http://sigma.octopart.com:80/conflict_mineral_statement/Yageo-company-3.pdf?src-supplier=Compliance+Statements, ComponentLink14URL=http://sigma.octopart.com:80/conflict_mineral_statement/Yageo-company-3.pdf?src-supplier=Compliance+Statements, Composition="Thick Film", Depth=800µm, Features="Moisture Resistant", Height=450µm, Lead Free="Lead Free", Length=1.6mm, Lifecycle Status=Production, Military Standard=Not, Mounting Technology="Surface Mount", Number of Terminals=2, Number of Terminations=2, Packaging="Cut Tape", Pins=2, Power Dissipation=100mW, Power Rating=100mW, Pricing="1=0,1, 10=0,011, 25=0,0092, 50=0,0072, 100=0,0068, 250=0,00568 (USD)", REACH SVHC=Yes, RoHS=Compliant, Schedule B="8533210045, 8533210045|8533210045|8533210045|8533210045|8533210045", Stock=2687, Supplier=DigiKey, Supplier 1=DigiKey, Supplier Part Number 1=YAG3328CT-ND, Termination=SMD/SMT, Tolerance=1%, Voltage Rating (DC)=50V, Width=800µm, Working Voltage=75V
R10: library part "RESISTOR - GENERIC", "Chip Resistor Automotive Grade Thick Film 0603 1MOhm 1% Paper T/R", .Case/Package=0603, .Tolerance=1%, Manufacturer="Yageo Group", Manufacturer Part Number=AC0603FR-7W1ML, Max Operating Temperature=155°C, Min Operating Temperature=-55°C, Power Dissipation=200mW, Supplier Part Number=13-AC0603FR-7W1MLCT-ND, Temperature Coefficient=100ppm/°C, Voltage Rating=75V, Case/Package=0603, Category="Chip SMD Resistors", China RoHS=Non-Compliant, ComponentLink1Description=https://datasheet.octopart.com:443/AC0603FR-7W1ML-Yageo-datasheet-182189377.pdf?src-supplier=IHS, ComponentLink1URL=https://datasheet.octopart.com:443/AC0603FR-7W1ML-Yageo-datasheet-182189377.pdf?src-supplier=IHS, ComponentLink2Description=https://datasheet.octopart.com:443/AC0603FR-7W1ML-Yageo-datasheet-86786639.pdf?src-supplier=Upverter, ComponentLink2URL=https://datasheet.octopart.com:443/AC0603FR-7W1ML-Yageo-datasheet-86786639.pdf?src-supplier=Upverter, ComponentLink3Description=https://datasheet.octopart.com/AC0603FR-7W1ML-Yageo-datasheet-12512238.pdf, ComponentLink3URL=https://datasheet.octopart.com/AC0603FR-7W1ML-Yageo-datasheet-12512238.pdf, ComponentLink4Description=http://sigma.octopart.com:80/rohs_statement/Yageo-company-2.pdf?src-supplier=Compliance+Statements, ComponentLink4URL=http://sigma.octopart.com:80/rohs_statement/Yageo-company-2.pdf?src-supplier=Compliance+Statements, ComponentLink5Description=http://sigma.octopart.com:80/conflict_mineral_statement/Yageo-company-3.pdf?src-supplier=Compliance+Statements, ComponentLink5URL=http://sigma.octopart.com:80/conflict_mineral_statement/Yageo-company-3.pdf?src-supplier=Compliance+Statements, Composition="Thick Film", Height=450µm, Lifecycle Status=Production, Mounting Technology="Surface Mount", Number of Terminals=2, Packaging="Tape & Reel", Power Rating=200mW, Pricing="1=0,1, 10=0,016, 25=0,0132, 50=0,0102, 100=0,0092 (USD)", REACH SVHC=Yes, RoHS=Compliant, Stock=95338, Supplier=DigiKey, Supplier 1=DigiKey, Supplier Part Number 1=13-AC0603FR-7W1MLCT-ND, Tolerance=1%, Width=800µm, Working Voltage=75V
R12: library part "RESISTOR - GENERIC", "Res Thick Film 0603 200K Ohm 1% 0.1W(1/10W) ±100ppm/C Pad SMD T/R", .Case/Package=0603, .Tolerance=1%, Manufacturer="Yageo Group", Manufacturer Part Number=RC0603FR-07200KL, Max Operating Temperature=155°C, Max Power Dissipation=100mW, Min Operating Temperature=-55°C, Supplier Part Number=311-200KHRCT-ND, Temperature Coefficient=100ppm/°C, Voltage Rating=75V, Voltage Rating (DC)=50V, Case Code (Imperial)=0603, Case/Package=0603, Category="Chip SMD Resistors", China RoHS=Non-Compliant, ComponentLink1Description=https://datasheet.octopart.com:443/RC0603FR-07200KL-Yageo-datasheet-175887523.pdf?src-supplier=IHS, ComponentLink1URL=https://datasheet.octopart.com:443/RC0603FR-07200KL-Yageo-datasheet-175887523.pdf?src-supplier=IHS, ComponentLink2Description=https://datasheet.octopart.com:443/RC0603FR-07200KL-Yageo-datasheet-141265859.pdf?src-supplier=Upverter, ComponentLink2URL=https://datasheet.octopart.com:443/RC0603FR-07200KL-Yageo-datasheet-141265859.pdf?src-supplier=Upverter, ComponentLink3Description=https://datasheet.octopart.com:443/RC0603FR-07200KL-Yageo-datasheet-103092701.pdf?src-supplier=Upverter, ComponentLink3URL=https://datasheet.octopart.com:443/RC0603FR-07200KL-Yageo-datasheet-103092701.pdf?src-supplier=Upverter, ComponentLink4Description=https://sigma.octopart.com:443/138820526/technical_drawing/Yageo-RC0603FR-07200KL.pdf?src-supplier=Upverter, ComponentLink4URL=https://sigma.octopart.com:443/138820526/technical_drawing/Yageo-RC0603FR-07200KL.pdf?src-supplier=Upverter, ComponentLink5Description=https://datasheet.octopart.com:443/RC0603FR-07200KL-Yageo-datasheet-8328172.pdf?src-supplier=Burklin+Elektronik, ComponentLink5URL=https://datasheet.octopart.com:443/RC0603FR-07200KL-Yageo-datasheet-8328172.pdf?src-supplier=Burklin+Elektronik, ComponentLink6Description=https://datasheet.octopart.com:443/RC0603FR-07200KL-Yageo-datasheet-62067350.pdf?src-supplier=Farnell, ComponentLink6URL=https://datasheet.octopart.com:443/RC0603FR-07200KL-Yageo-datasheet-62067350.pdf?src-supplier=Farnell, ComponentLink7Description=https://datasheet.octopart.com:443/RC0603FR-07200KL-Yageo-datasheet-34211833.pdf?src-supplier=element14+APAC, ComponentLink7URL=https://datasheet.octopart.com:443/RC0603FR-07200KL-Yageo-datasheet-34211833.pdf?src-supplier=element14+APAC, ComponentLink8Description=https://datasheet.octopart.com:443/RC0603FR-07200KL-Yageo-datasheet-164759695.pdf?src-supplier=Future+Electronics, ComponentLink8URL=https://datasheet.octopart.com:443/RC0603FR-07200KL-Yageo-datasheet-164759695.pdf?src-supplier=Future+Electronics, ComponentLink9Description=https://datasheet.octopart.com:443/RC0603FR-07200KL-Yageo-datasheet-137700087.pdf?src-supplier=Future+Electronics, ComponentLink9URL=https://datasheet.octopart.com:443/RC0603FR-07200KL-Yageo-datasheet-137700087.pdf?src-supplier=Future+Electronics, ComponentLink10Description=https://datasheet.octopart.com:443/RC0603FR-07200KL-Yageo-datasheet-15599030.pdf?src-supplier=Future+Electronics, ComponentLink10URL=https://datasheet.octopart.com:443/RC0603FR-07200KL-Yageo-datasheet-15599030.pdf?src-supplier=Future+Electronics, ComponentLink11Description=https://datasheet.octopart.com:443/RC0603FR-07200KL-Yageo-datasheet-12596169.pdf?src-supplier=Future+Electronics, ComponentLink11URL=https://datasheet.octopart.com:443/RC0603FR-07200KL-Yageo-datasheet-12596169.pdf?src-supplier=Future+Electronics, ComponentLink12Description=https://datasheet.octopart.com:443/RC0603FR-07200KL-Yageo-datasheet-8324193.pdf?src-supplier=Future+Electronics, ComponentLink12URL=https://datasheet.octopart.com:443/RC0603FR-07200KL-Yageo-datasheet-8324193.pdf?src-supplier=Future+Electronics, ComponentLink13Description=https://datasheet.octopart.com:443/RC0603FR-07200KL-Yageo-datasheet-148775077.pdf?src-supplier=TME, ComponentLink13URL=https://datasheet.octopart.com:443/RC0603FR-07200KL-Yageo-datasheet-148775077.pdf?src-supplier=TME, ComponentLink14Description=https://datasheet.octopart.com:443/RC0603FR-07200KL-Yageo-datasheet-79472498.pdf?src-supplier=Megastar, ComponentLink14URL=https://datasheet.octopart.com:443/RC0603FR-07200KL-Yageo-datasheet-79472498.pdf?src-supplier=Megastar, ComponentLink15Description=https://datasheet.octopart.com/RC0603FR-07200KL-Yageo-datasheet-73766026.pdf, ComponentLink15URL=https://datasheet.octopart.com/RC0603FR-07200KL-Yageo-datasheet-73766026.pdf, ComponentLink16Description=https://datasheet.octopart.com:443/RC0603FR-07200KL-Yageo-datasheet-118562.pdf?src-supplier=DigiKey, ComponentLink16URL=https://datasheet.octopart.com:443/RC0603FR-07200KL-Yageo-datasheet-118562.pdf?src-supplier=DigiKey, ComponentLink17Description=http://sigma.octopart.com:80/rohs_statement/Yageo-company-2.pdf?src-supplier=Compliance+Statements, ComponentLink17URL=http://sigma.octopart.com:80/rohs_statement/Yageo-company-2.pdf?src-supplier=Compliance+Statements, ComponentLink18Description=http://sigma.octopart.com:80/conflict_mineral_statement/Yageo-company-3.pdf?src-supplier=Compliance+Statements, ComponentLink18URL=http://sigma.octopart.com:80/conflict_mineral_statement/Yageo-company-3.pdf?src-supplier=Compliance+Statements, Composition="Thick Film", Depth=800µm, Features="Moisture Resistant", Height=450µm, Lead Free="Lead Free", Length=1.6mm, Lifecycle Status=Production, Military Standard=Not, Mounting Technology="Surface Mount", Number of Terminals=2, Number of Terminations=2, Packaging="Tape & Reel", Pins=2, Power Dissipation=100mW, Power Rating=100mW, Pricing="1=0,1, 10=0,008, 25=0,0076, 50=0,0072, 100=0,0051 (USD)", REACH SVHC=Yes, RoHS=Compliant, Schedule B="8533210045, 8533210045|8533210045, 8533210045|8533210045|8533210045, 8533210045|8533210045|8533210045|8533210045", Stock=343076, Supplier=DigiKey, Supplier 1=DigiKey, Supplier Part Number 1=311-200KHRCT-ND, Termination=SMD/SMT, Tolerance=1%, Width=800µm, Working Voltage=75V
R13: library part "RESISTOR - GENERIC", "Res Thick Film 0603 2.1M Ohm 1% 1/10W ±100ppm/°C Molded SMD SMD Paper T/R", .Case/Package=0603, .Tolerance=1%, Case Code (Metric)=1608, Manufacturer="Yageo Group", Manufacturer Part Number=RC0603FR-072M1L, Max Operating Temperature=155°C, Max Power Dissipation=100mW, Min Operating Temperature=-55°C, Supplier Part Number=13-RC0603FR-072M1LCT-ND, Temperature Coefficient=100ppm/°C, Voltage Rating=75V, Case Code (Imperial)=0603, Case/Package=0603, Category="Chip SMD Resistors", China RoHS=Non-Compliant, ComponentLink1Description=https://datasheet.octopart.com:443/RC0603FR-072M1L-Yageo-datasheet-175887523.pdf?src-supplier=IHS, ComponentLink1URL=https://datasheet.octopart.com:443/RC0603FR-072M1L-Yageo-datasheet-175887523.pdf?src-supplier=IHS, ComponentLink2Description=https://datasheet.octopart.com:443/RC0603FR-072M1L-Yageo-datasheet-103092701.pdf?src-supplier=Upverter, ComponentLink2URL=https://datasheet.octopart.com:443/RC0603FR-072M1L-Yageo-datasheet-103092701.pdf?src-supplier=Upverter, ComponentLink3Description=https://datasheet.octopart.com/RC0603FR-072M1L-Yageo-datasheet-73766026.pdf, ComponentLink3URL=https://datasheet.octopart.com/RC0603FR-072M1L-Yageo-datasheet-73766026.pdf, ComponentLink4Description=https://datasheet.octopart.com:443/RC0603FR-072M1L-Yageo-datasheet-8328172.pdf?src-supplier=_legacy+Avnet, ComponentLink4URL=https://datasheet.octopart.com:443/RC0603FR-072M1L-Yageo-datasheet-8328172.pdf?src-supplier=_legacy+Avnet, ComponentLink5Description=http://sigma.octopart.com:80/rohs_statement/Yageo-company-2.pdf?src-supplier=Compliance+Statements, ComponentLink5URL=http://sigma.octopart.com:80/rohs_statement/Yageo-company-2.pdf?src-supplier=Compliance+Statements, ComponentLink6Description=http://sigma.octopart.com:80/conflict_mineral_statement/Yageo-company-3.pdf?src-supplier=Compliance+Statements, ComponentLink6URL=http://sigma.octopart.com:80/conflict_mineral_statement/Yageo-company-3.pdf?src-supplier=Compliance+Statements, Composition="Thick Film", Contact Plating=Tin, Features="Moisture Resistant", Height=450µm, Length=1.6002mm, Lifecycle Status=Production, Mounting Technology="Surface Mount", Number of Terminals=2, Number of Terminations=2, Packaging="Tape & Reel", Power Dissipation=100mW, Power Rating=100mW, Pricing="1=0,1, 10=0,007, 25=0,0052 (USD)", Radiation Hardening=No, REACH SVHC=Yes, RoHS=Compliant, Schedule B="8533210045, 8533210045|8533210045|8533210045|8533210045|8533210045", Stock=19743, Supplier=DigiKey, Supplier 1=DigiKey, Supplier Part Number 1=13-RC0603FR-072M1LCT-ND, Termination=SMD/SMT, Tolerance=1%, Width=800µm, Working Voltage=75V